# Altium PCB PCB2.PcbDoc
Units mm, origin at the board's own origin, x right, y up, seen from the top; angles counter-clockwise.
Board outline 119.61 x 82.41 mm, 2 copper layers (Top Layer, Bottom Layer), stack 1.271 mm thick; 25 components, 17 nets, 71 pads, 0 vias.
Unrouted connection lines stored in the file: 1.
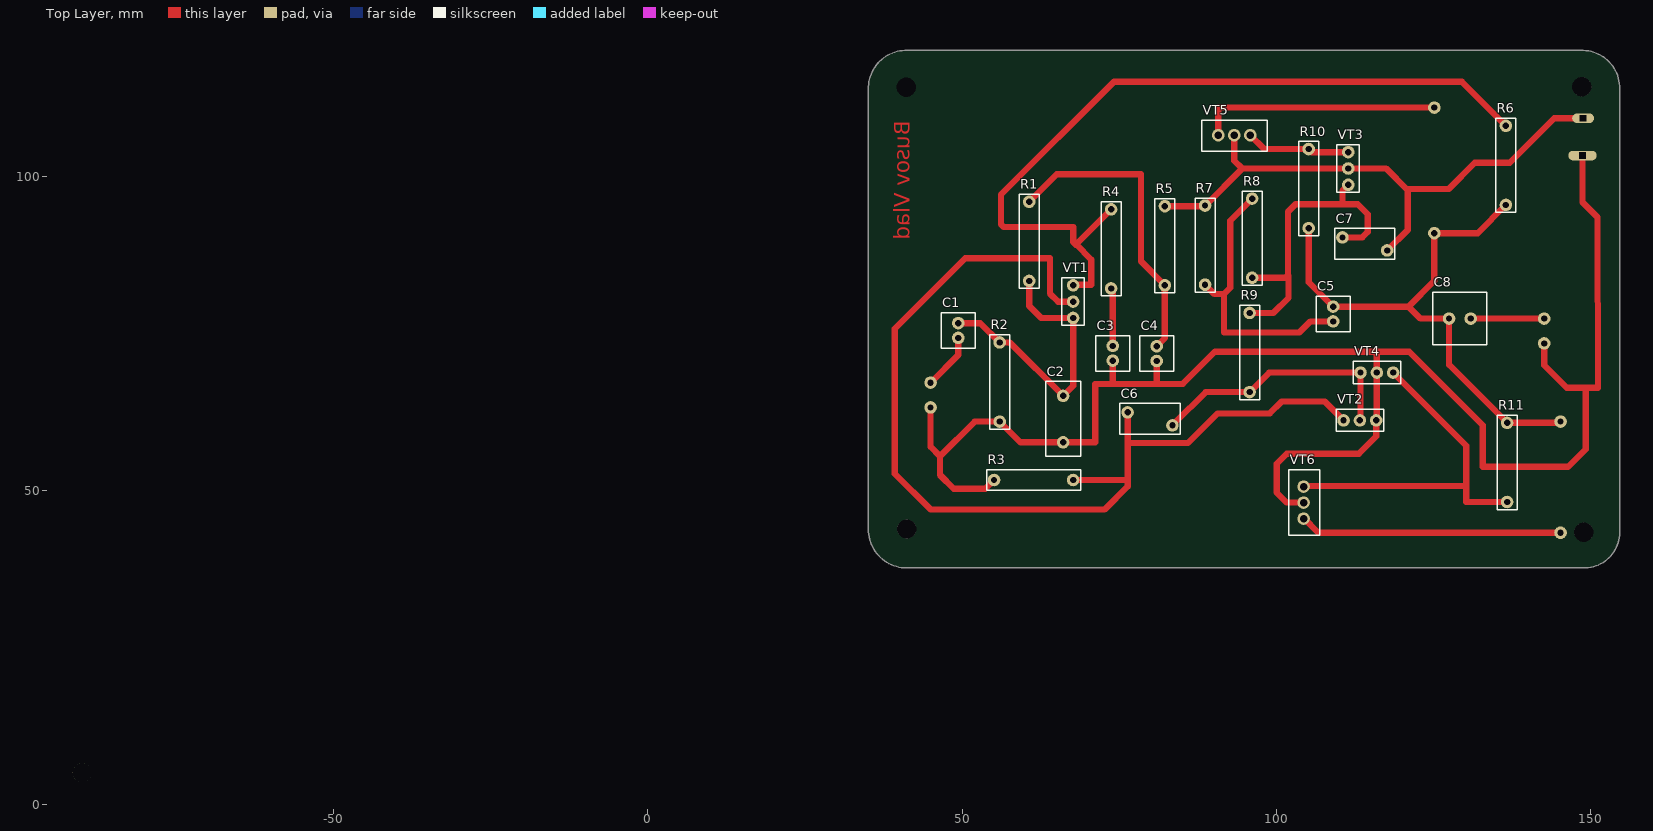
[diagram p0: Top Layer view]
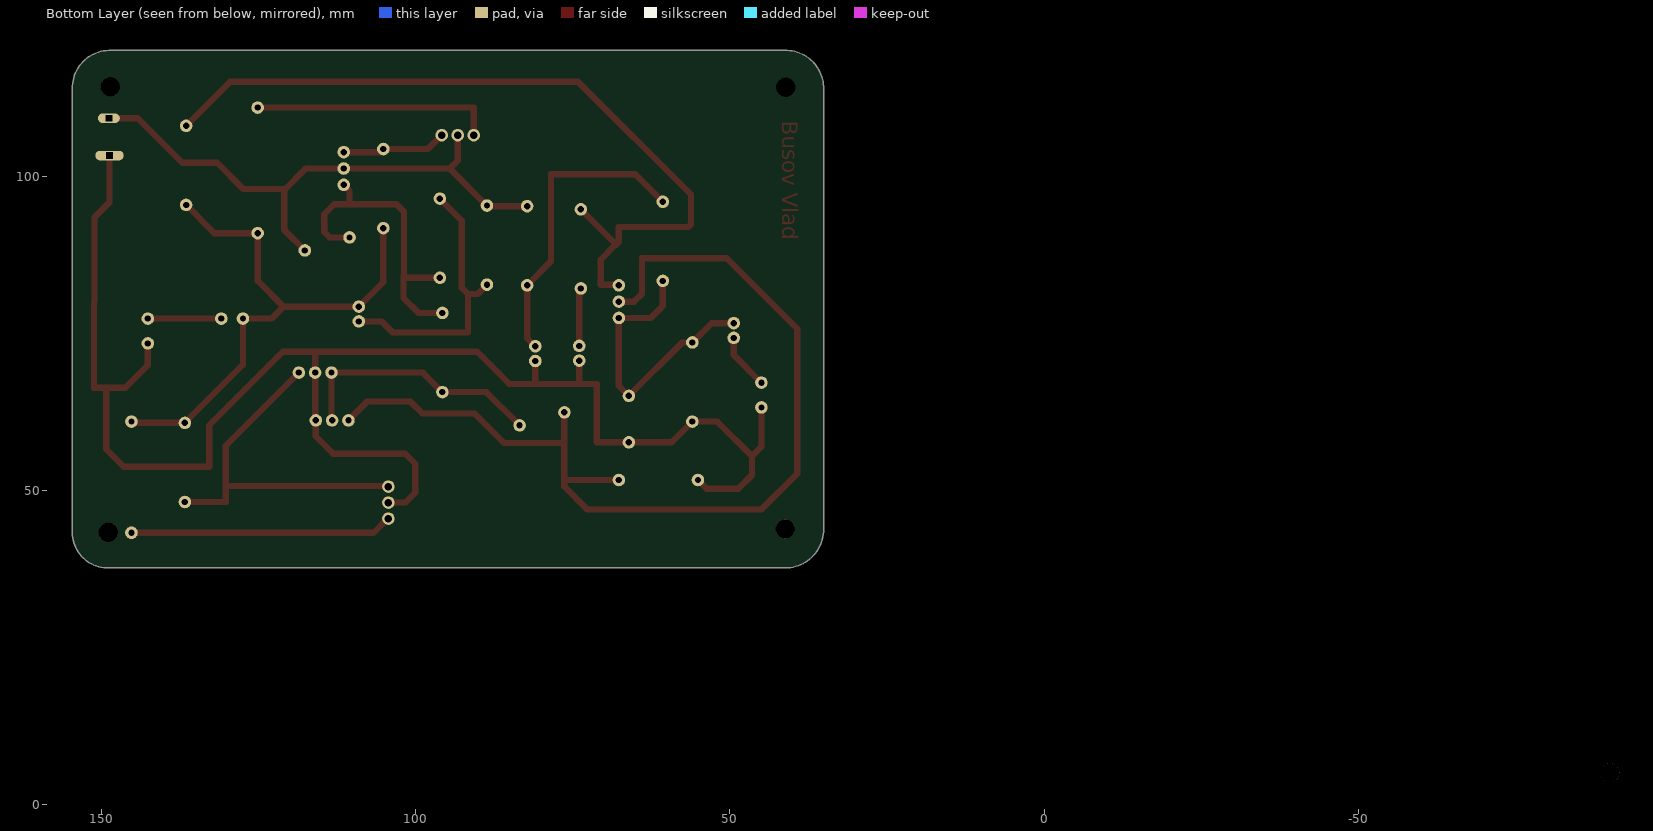
[diagram p1: Bottom Layer view, seen from below]
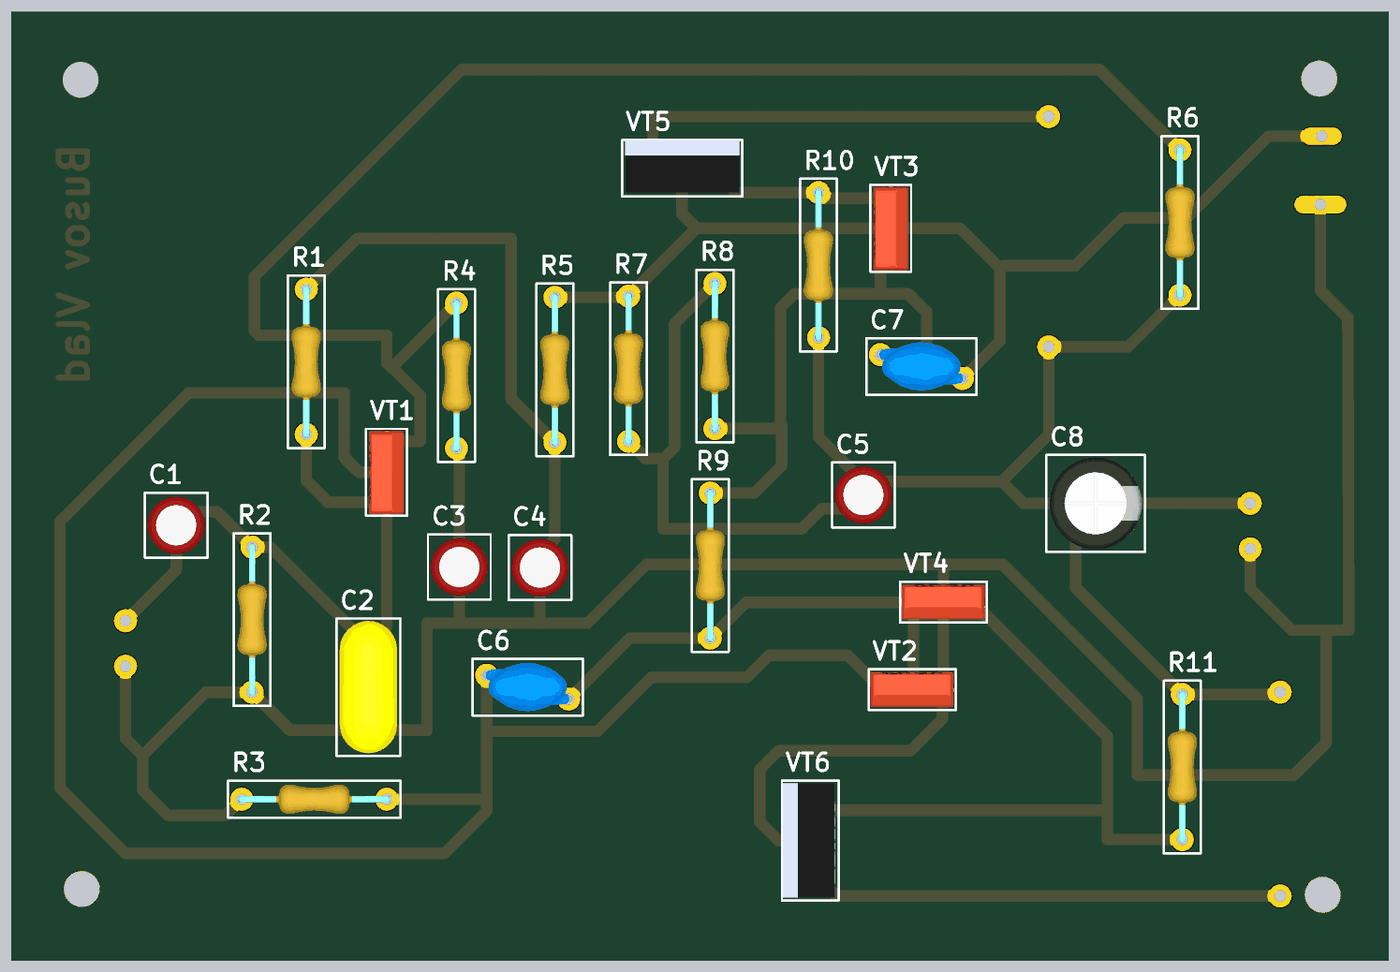
[diagram p2: 3D render of the assembled board from above, using the file's embedded part models]

## Layer stack, top to bottom
Top Solder: solder mask 0.0102, Solder Resist, Dk 3.5
Top Layer: signal copper 0.0356
Dielectric 1: dielectric 1.2, FR-4, Dk 4.2
Bottom Layer: signal copper 0.0356
Bottom Solder: solder mask 0.0102, Solder Resist, Dk 3.5

## Board outline
35.1,43.4 35.1,114.2 cw(c35.6,114.2) 35.1,114.218 cw(c41.1,114) 41.309,120 148.489,120 cw(c148.75,114.05) 154.7,114.323 cw(c154.2,114.3) 154.7,114.3 154.7,43.512 cw(c149.05,43.25) 154.706,43.25 cw(c149.05,43.25) 149.324,37.6 cw(c149.3,38.1) 149.3,37.6 41.615,37.6 cw(c41.25,43.75) 35.101,43.369 cw(c35.6,43.4)

## Design rules (kind name [scope] priority, off if disabled: settings)
AssemblyTestPointUsage [All] p1 off:
AssemblyTestpoint [All] p1 off: testpointundercomponent=TRUE minsize=1.016 maxsize=2.54 preferedsize=1.524 minholesize=0 maxholesize=1.016 preferedholesize=0.813 testpointgrid=0.025 usegrid=TRUE gridtolerance=0 allowsidetop=TRUE allowsidebottom=TRUE
Clearance [All] p1 off: gap=0.254 ignorepadtopadclearanceinfootprint=FALSE except(0: Arc-Hole Track-Hole SMDPad-Hole THPad-Hole Via-Hole Fill-Hole Poly-Hole Region-Hole Text-Hole)
ComponentClearance [All] p1 off: gap=0.254 collisioncheckmode=3 verticalgap=0.254 showdistances=FALSE
DiffPairsRouting [All] p1 off: maxlimit=0.254 minlimit=0.254 mostfreqgap=0.254 toplayer_minwidth=0.381 toplayer_maxwidth=0.381 toplayer_prefwidth=0.381 bottomlayer_minwidth=0.381 bottomlayer_maxwidth=0.381 bottomlayer_prefwidth=0.381 maxuncoupledlength=12.7
FabricationTestPointUsage [All] p1 off: valid=0 allowmultiple=FALSE
FabricationTestpoint [All] p1 off: side=3 testpointundercomponent=TRUE minsize=1.016 maxsize=2.54 preferedsize=1.524 minholesize=0 maxholesize=1.016 preferedholesize=0.813 testpointgrid=0.025 allowsidetop=TRUE allowsidebottom=TRUE usegrid=TRUE gridtolerance=0
FanoutControl Fanout_BGA [IsBGA] p1 off: bgadir=Out bgaviamode=Centered fanoutstyle=Auto fanoutdirection=Alternating viagrid=0.025 // Fanout_BGA (Default Rule)
FanoutControl Fanout_LCC [IsLCC] p2 off: bgadir=Out bgaviamode=Centered fanoutstyle=Auto fanoutdirection=Alternating viagrid=0.025 // Fanout_LCC (Default Rule)
FanoutControl Fanout_SOIC [IsSOIC] p3 off: bgadir=Out bgaviamode=Centered fanoutstyle=Auto fanoutdirection=Alternating viagrid=0.025 // Fanout_SOIC (Default Rule)
FanoutControl Fanout_Small [(CompPinCount < 5)] p4 off: bgadir=Out bgaviamode=Centered fanoutstyle=Auto fanoutdirection=OutThenIn viagrid=0.025 // Fanout_Small (Default Rule)
FanoutControl Fanout_Default [All] p5 off: bgadir=Out bgaviamode=Centered fanoutstyle=Auto fanoutdirection=Alternating viagrid=0.025 // Fanout_Default (Default Rule)
Height [All] p1 off: minheight=0 maxheight=25.4 prefheight=12.7
HoleSize [All] p1 off: absolutevalues=TRUE maxlimit=2.54 minlimit=0.025 maxpercent=80.000 minpercent=20.000
HoleToHoleClearance [All] p1 off: gap=0.254 allowstackedmicrovias=TRUE
LayerPairs [All] p1 off: enforce=TRUE
MinimumSolderMaskSliver [All] p1 off: minsoldermaskwidth=0.254
NetAntennae [All] p1 off: netantennaetolerance=0
PasteMaskExpansion [All] p1 off: expansion=0
PlaneClearance [All] p1 off: clearance=0.508
PlaneConnect [All] p1 off: planeconnectstyle=Relief reliefexpansion=0.508 reliefentries=4 reliefconductorwidth=0.254 reliefairgap=0.254
PolygonConnect [All] p1 off: connectstyle=Relief reliefconductorwidth=0.254 reliefentries=4 polygonreliefangle="90 Angle" airgapwidth=0.254
RoutingCorners [All] p1 off: cornerstyle=45-Degree minsetback=2.54 maxsetback=2.54
RoutingLayers [All] p1 off: top layer_v5=TRUE bottom layer_v5=TRUE
RoutingPriority [All] p1 off: routingpriority=0
RoutingTopology [All] p1 off: topology=Shortest
RoutingVias [All] p1 off: holewidth=0.711 width=1.27 viastyle="Through Hole" minholewidth=0.711 minwidth=1.27 maxholewidth=0.711 maxwidth=1.27
ShortCircuit [All] p1 off: allowed=FALSE
SilkToBoardRegionClearance [All] p1 off:
SilkToSilkClearance [All] p1 off: silktosilkclearance=0.254
SilkToSolderMaskClearance [IsPad] p1 off: minsilkscreentomaskgap=0.254 clearancetoexposedcopper=TRUE
SolderMaskExpansion [All] p1 off: expansion=0.102
UnRoutedNet [All] p1 off:
UnpouredPolygon [All] p1 off:
Width [All] p1: maxlimit=1 minlimit=1 preferedwidth=1 minimp=50.000000 maximp=50.000000 favimp=50.000000

## Components (designator, comment, footprint, x,y, rotation, side; value= is the part's Value field where it differs from the comment)
C1 "*" K50-35(5X11) 49.4,75.4 r0 top
C2 "" K73-17 66.1,61.3 r180 top
C3 "*" K50-35(5X11) 74,71.775 r180 top
C4 "*" K50-35(5X11) 81,71.725 r180 top
C5 "*" K50-35(5X11) 109.1,78.025 r0 top
C6 "" K10-17 79.9,61.35 r270 top
C7 "" K10-17 114.1,89.2 r270 top
C8 "1000u" K50-35(8X11.5) 129.275,77.3 r270 top
R1 "33k" CF-100 60.7,89.6 r180 top
R2 "33k" CF-100 56,67.2 r0 top
R3 "1.5k" CF-100 61.4,51.6 r270 top
R4 "470" CF-100 73.75,88.4 r180 top
R5 "18k" CF-100 82.3,88.9 r180 top
R6 "3.3k" CF-100 136.6,101.7 r0 top
R7 "390" CF-100 88.7,89 r0 top
R8 "2.7k" CF-100 96.2,90.1 r0 top
R9 "560" CF-100 95.8,71.9 r0 top
R10 "100" CF-100 105.2,98 r0 top
R11 "100" CF-100 136.8,54.4 r0 top
VT1 "PNP-transistor" KT315 67.7,80 r180 top
VT2 "NPN-transistor" KT315 113.35,61.1 r90 top
VT3 "NPN-transistor" KT315 111.5,101.2 r180 top
VT4 "PNP-transistor" KT315 116.05,68.7 r90 top
VT5 "NPN-transistor" KT818 93.35,106.5 r270 top
VT6 "PNP-transistor" KT818 104.4,48 r0 top

## Footprints (in the part's own frame and the unit in brackets; to place one, negate y for a bottom-side part, rotate by r counter-clockwise, add the part's x,y. Pads: shape width x height; smd on the part's side, far side on the other; paste and mask are expansions set on the pad)
CF-100 [mm]
  round 2 hole 1: 1(0,-6.3) 2(0,6.3)
  silkscreen extent -1.6,-7.5 1.6,7.5, body extent -1.27,-6.63 1.27,6.63, height 2.54
K10-17 [mm]
  round 2 hole 1: 1(-1.025,-3.525) 2(1.05,3.6)
  silkscreen extent -2.45,-4.75 2.47,4.82, body extent -2.1,-3.87 2.1,3.93, height 8.1
K50-35(5X11) [mm]
  round 2 hole 1: 1(0,-1.175) 2(0,1.175)
  silkscreen extent -2.73,-2.83 2.73,2.83, body extent -2.5,-2.5 2.5,2.5, height 12.2
K50-35(8X11.5) [mm]
  round 2 hole 1: 1(0,-1.725) 2(0,1.725)
  silkscreen extent -4.2,-4.3 4.2,4.3, body extent -4,-4 4,4, height 13.2
K73-17 [mm]
  round 2 hole 1: 1(0,-3.7) 2(0,3.7)
  silkscreen extent -2.78,-6 2.78,5.92, body extent -2.5,-5.8 2.5,5.7, height 12
KT315 [mm]
  round 2 hole 1: 1(0,2.6) 2(0,0) 3(0,-2.6)
  silkscreen extent -1.75,-3.77 1.8,3.77, body extent -1.47,-3.57 1.52,3.62, height 7.7
KT818 [mm]
  round 2 hole 1.2: 1(0,2.55) 2(0,0) 3(0,-2.55)
  silkscreen extent -2.37,-5.2 2.55,5.23, body extent -2.34,-4.94 2.2,4.99, height 19.66

## Part data
C1 C3 C4 C5 C8: library part CapacitorPolar
C2 C6 C7: library part Capacitor
R1 R2 R3 R4 R5 R6 R7 R8 R9 R10 R11: library part Resistor

## Free pads (board coordinates)
  round 3 hole 3.1: 8(-90.1,5) 8(41.2,43.8) 8(148.7,114.2) 8(149,43.3)
  round 0 hole 3.1: 8(41.1,114.1)
  round 2 hole 1: 9(45,63.15) 9(45,67.1) 9(125.2,110.9) 9(125.2,90.9) 9(142.7,73.35) 9(142.7,77.3) 9(145.3,43.2) 9(145.3,60.9)
  oval 4.524x1.524 hole 1 square: 10(148.8,103.26)
  oval 3.5x1.5 hole 1 square: 11(148.9,109.2)

## Nets (pads, with @x,y where several pads share a name; then routed paths per layer and width w, separated by ;. In a path a pad name is that pad's centre, name@x,y a point inside that pad or via, vN(x,y) a via of type N, cw(c..) or ccw(c..) an arc to the next point about the centre after c; other vN are vias at no path point)
GND: C2.2 C3.2 C4.2 pad.9@142.7,73.35 pad.9@145.3,43.2 pad.10 R2.1 R3.1 VT2.3 VT4.2 VT6.2 | length 252.9
  Top Layer w1: R3.1 53.7,50.2 48.7,50.2 46.5,52.4 46.5,55.4 52,60.9 R2.1 59.3,57.6 C2.2 71.2,57.6 71.2,66.9 74,66.9 ; C3.2 74,66.9 ; C4.2 81,66.9 ; VT6.2 101.7,48 100.1,49.6 100.1,54.2 101.7,55.8 113.2,55.8 115.95,58.55 VT2.3 116.05,61.2 VT4.2 116.05,71.95 116,72 ; pad.9@142.7,73.35 142.7,69.88 146.3,66.28 149.3,66.28 ; pad.10 148.8,95.826 151.187,93.44 151.264,66.28 149.3,66.28 ; 74,66.9 81,66.9 ; 81,66.9 85.175,66.9 90.275,72 116,72 ; 116,72 121.2,72 132.9,60.3 132.9,53.7 146.5,53.7 149.3,56.5 149.3,66.28
NetC1_1: C1.1 | length 9.1
  Top Layer w1: 45,67.1 49.4,71.5 C1.1 C1.1@49.3,74.125
NetC1_2: C1.2 C2.1 R1.2 R2.2 VT1.1 | length 46.3
  Top Layer w1: C1.2 52.925,76.575 R2.2 57.6,73.5 C2.1 67.7,66.6 VT1.1 62.6,77.4 60.7,79.3 R1.2
NetC3_1: C3.1 R4.2 | length 9.5
  Top Layer w1: R4.2 74,81.85 C3.1 C3.1@73.85,73.1
NetC4_1: C4.1 R1.1 R5.2 | length 49.1
  Top Layer w1: R1.1 65.1,100.3 78.5,100.3 78.5,86.4 R5.2 82.3,74.2 C4.1
NetC5_1: C5.1 R7.1 R8.2 | length 45
  Top Layer w1: R7.1 90.2,81.2 91.7,81.2 ; R8.2@96.05,96.55 96.05,96.25 92.7,92.9 92.7,82.2 91.7,81.2 ; C5.1 105.491,76.85 103.741,75.1 91.7,75.1 91.7,81.2
NetC5_2: C5.2 C8.1 pad.9@125.2,90.9 pad.9@145.3,60.9 R6.1 R10.1 R11.2 | length 88.9
  Top Layer w1: R10.1 105.2,83.1 C5.2 121.1,79.2 ; R6.1 132.1,90.9 125.2,90.9 125.2,83.3 121.1,79.2 ; pad.9@145.3,60.7 R11.2 127.55,69.95 C8.1 123,77.3 121.1,79.2
NetC6_1: C6.1 R3.2 VT1.2 VT2.1 | length 162.1
  Top Layer w1: R3.2 76.175,51.6 76.375,51.4 ; VT1.2 65.3,80 64,81.3 64,86.9 50.5,86.9 39.3,75.7 39.3,52.6 45,46.9 72.7,46.9 76.375,50.575 76.375,51.4 ; C6.1 76.375,57.5 ; VT2.1 107.75,64.1 100.9,64.1 99,62.2 90.7,62.2 86,57.5 76.375,57.5 ; 76.375,51.4 76.375,57.5
NetC6_2: C6.2 R9.1 VT2.2 VT4.1 | length 40.9
  Top Layer w1: C6.2@83.5,60.7 83.9,60.7 88.8,65.6 R9.1 98.9,68.7 VT4.1 113.45,61.2 VT2.2
NetC7_1: C7.1 R8.1 R9.2 VT3.1 | length 51.3
  Top Layer w1: R9.2 99.6,78.2 102,80.6 102,84.1 101.9,84.2 ; R8.1 101.5,83.8 101.9,84.2 ; C7.1 113.725,90.225 114.6,91.1 114.6,93.9 113,95.5 110.575,95.5 ; VT3.1 110.575,97.675 110.575,95.5 ; 101.9,84.2 101.9,94.3 103.1,95.5 110.575,95.5
NetC7_2: C7.2 R5.1 R7.2 VT3.2 VT5.2 | length 92
  Top Layer w1: R5.1 88.6,95.2 R7.2 94.6,101.2 ; VT5.2 93.35,102.45 94.6,101.2 ; C7.2 120.963,91.412 120.963,97.762 ; 148.9,109.2 144.3,109.2 137.2,102.1 131.65,102.1 127.487,97.937 121.137,97.937 120.963,97.762 ; 94.6,101.2 VT3.2 117.525,101.2 120.963,97.762
NetC8_2: C8.2 pad.9@142.7,77.3 | length 11.7
  Top Layer w1: C8.2 pad.9@142.7,77.3
NetR4_1: R4.1 R6.2 VT1.3 | length 128.7
  Top Layer w1: VT1.3 67.8,82.7 70.6,82.7 70.6,86.7 68.175,89.125 ; R4.1 68.125,89.075 67.7,89.5 67.7,91.9 56.6,91.9 56.2,92.3 56.2,97 74.2,115 129.6,115 R6.2 R6.2@136.8,108.2
NetR10_2: R10.2 VT3.3 VT5.1 | length 16.7
  Top Layer w1: VT5.1 98.1,104.3 R10.2 105.7,103.8 VT3.3
NetR11_1: R11.1 VT4.3 VT6.1 | length 57.8
  Top Layer w1: VT6.1@104.4,50.65 130.25,50.65 130.3,50.7 ; VT4.3 130.3,57.05 130.3,50.7 ; R11.1 130.3,48.1 130.3,50.7
NetR12_2: pad.9@125.2,110.9 VT5.3 | length 38.8
  Top Layer w1: VT5.3 90.8,110.9 pad.9@125.2,110.9
NetR13_1: VT6.3 | length 41.9
  Top Layer w1: VT6.3@104.4,45.55 106.75,43.2 145.3,43.2
copper on no net: | length 8.4
  Top Layer w1: 45,63.15 45,56.9 46.5,55.4

## Other copper
Top Layer:
  text "Busov Vlad" at 41.7,108.8 h2.5 r90

## Silkscreen, mask and mechanical layers (free items; w line width, h text height)
Mechanical 15:
  lines w1: 30.4,124.5 30.4,124.5
Drill Drawing:
  lines w1: 154.2,43.1 154.2,114.3 ccw(c148.75,114.05) 148.5,119.5 ; 154.2,43.5 cw(c149.05,43.25) 149.3,38.1 41.6,38.1 cw(c41.25,43.75) 35.6,43.4 35.6,114.2 cw(c41.1,114) 41.3,119.5 148.5,119.5 ; 148.5,119.5 148.5,119.5